# Altium PCB E9A_05_6231.PcbDoc
Units mil, origin at the board's own origin, x right, y up, seen from the top; angles counter-clockwise.
Board outline 6000 x 4000 mil, 2 copper layers (Top Layer, Bottom Layer); 25 components, 17 nets, 97 pads, 4 vias.
Unrouted connection lines stored in the file: 2.
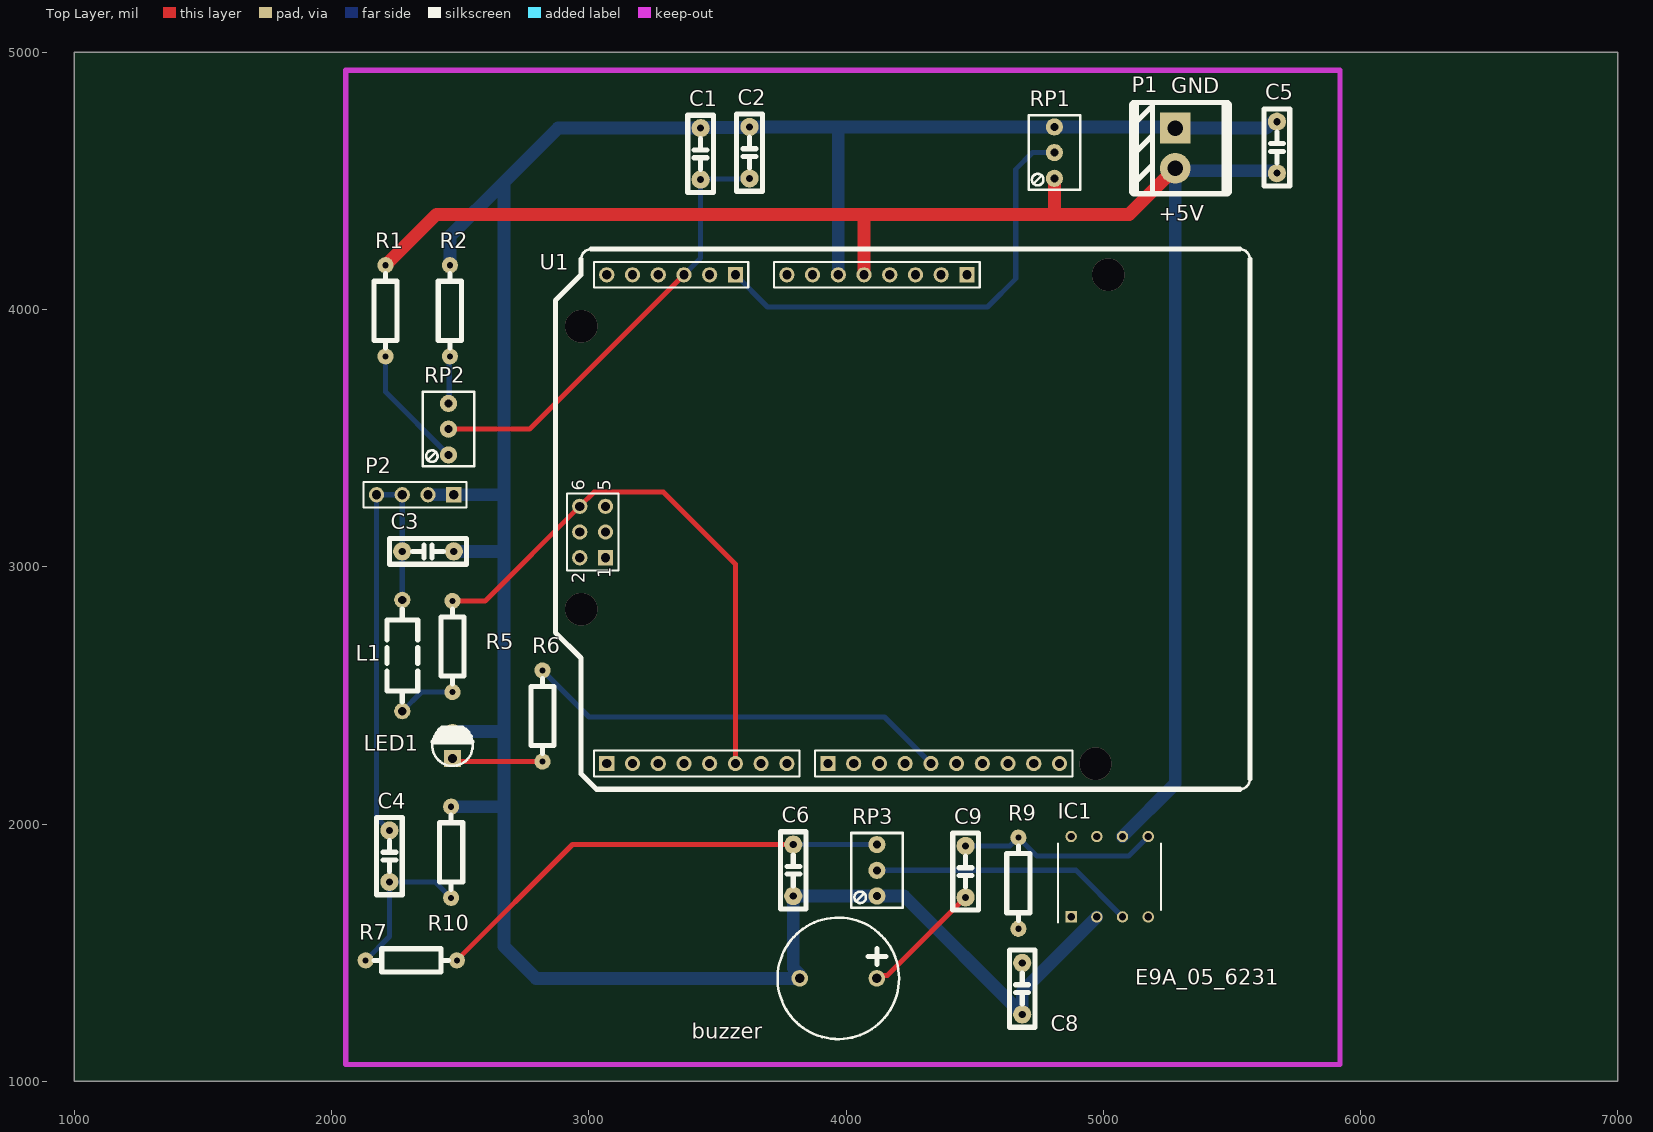
[diagram p0: Top Layer view]
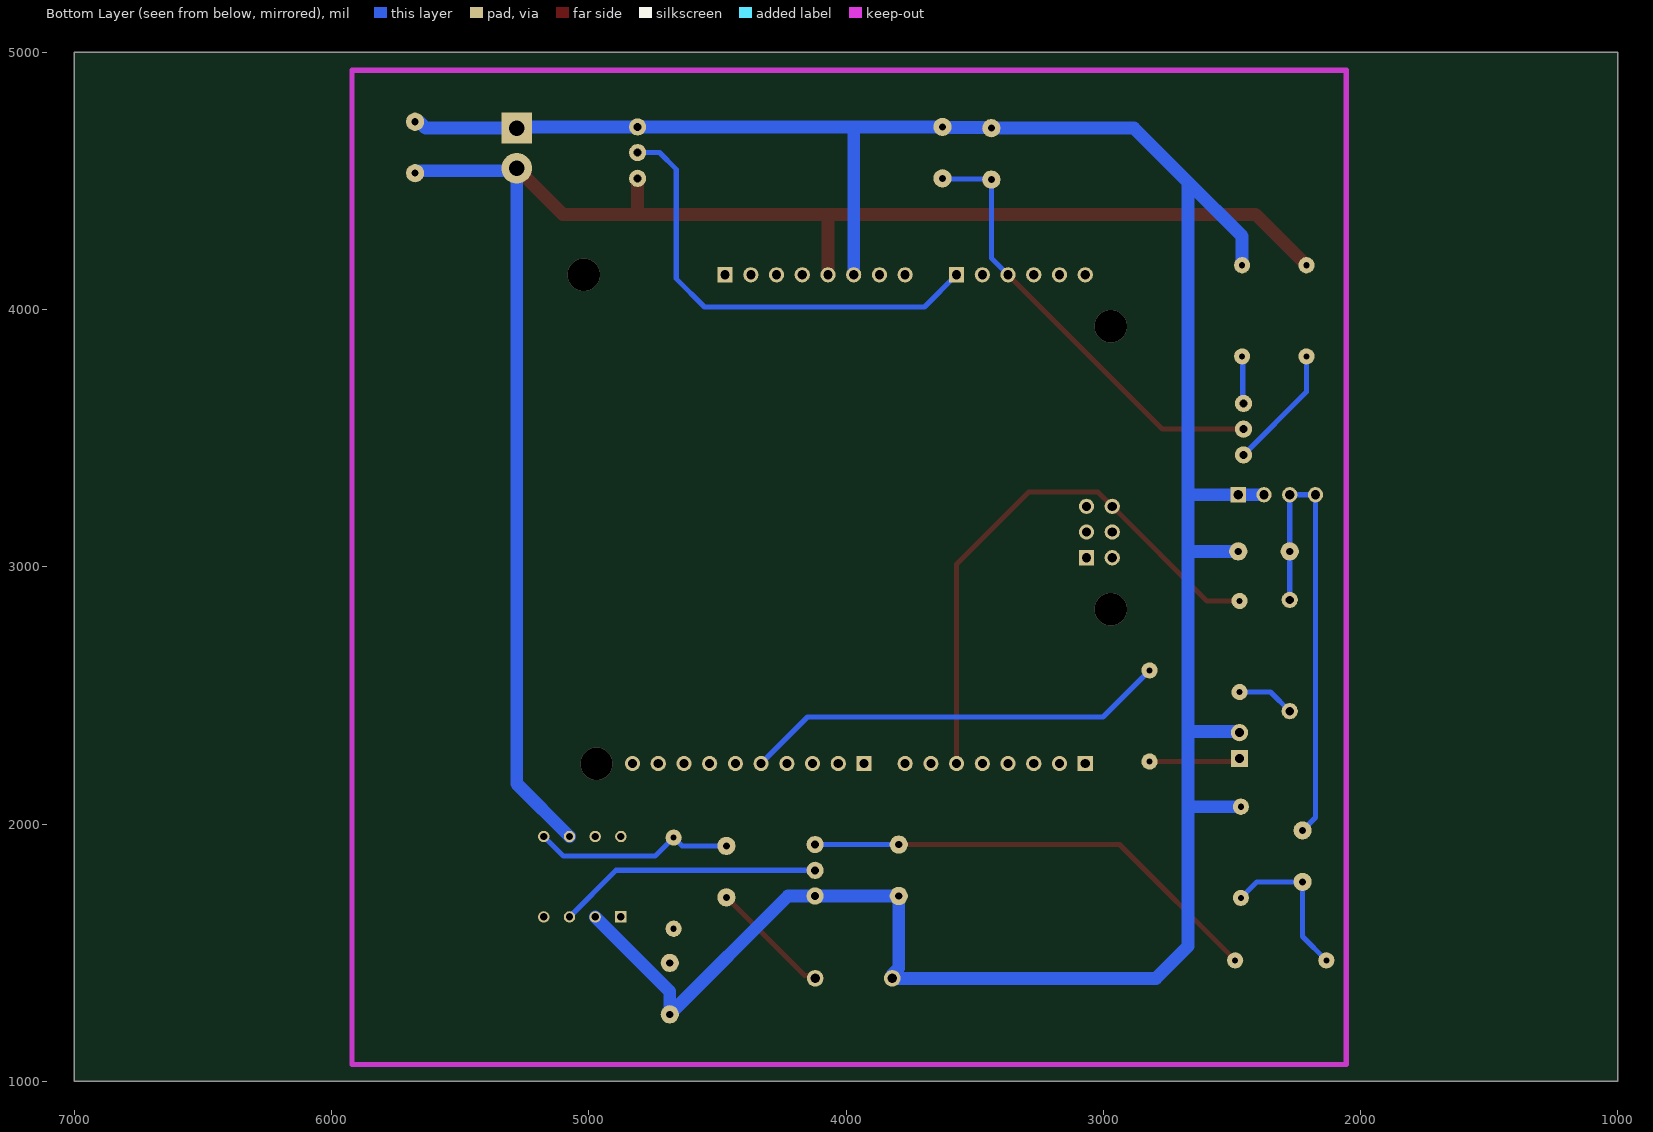
[diagram p1: Bottom Layer view, seen from below]
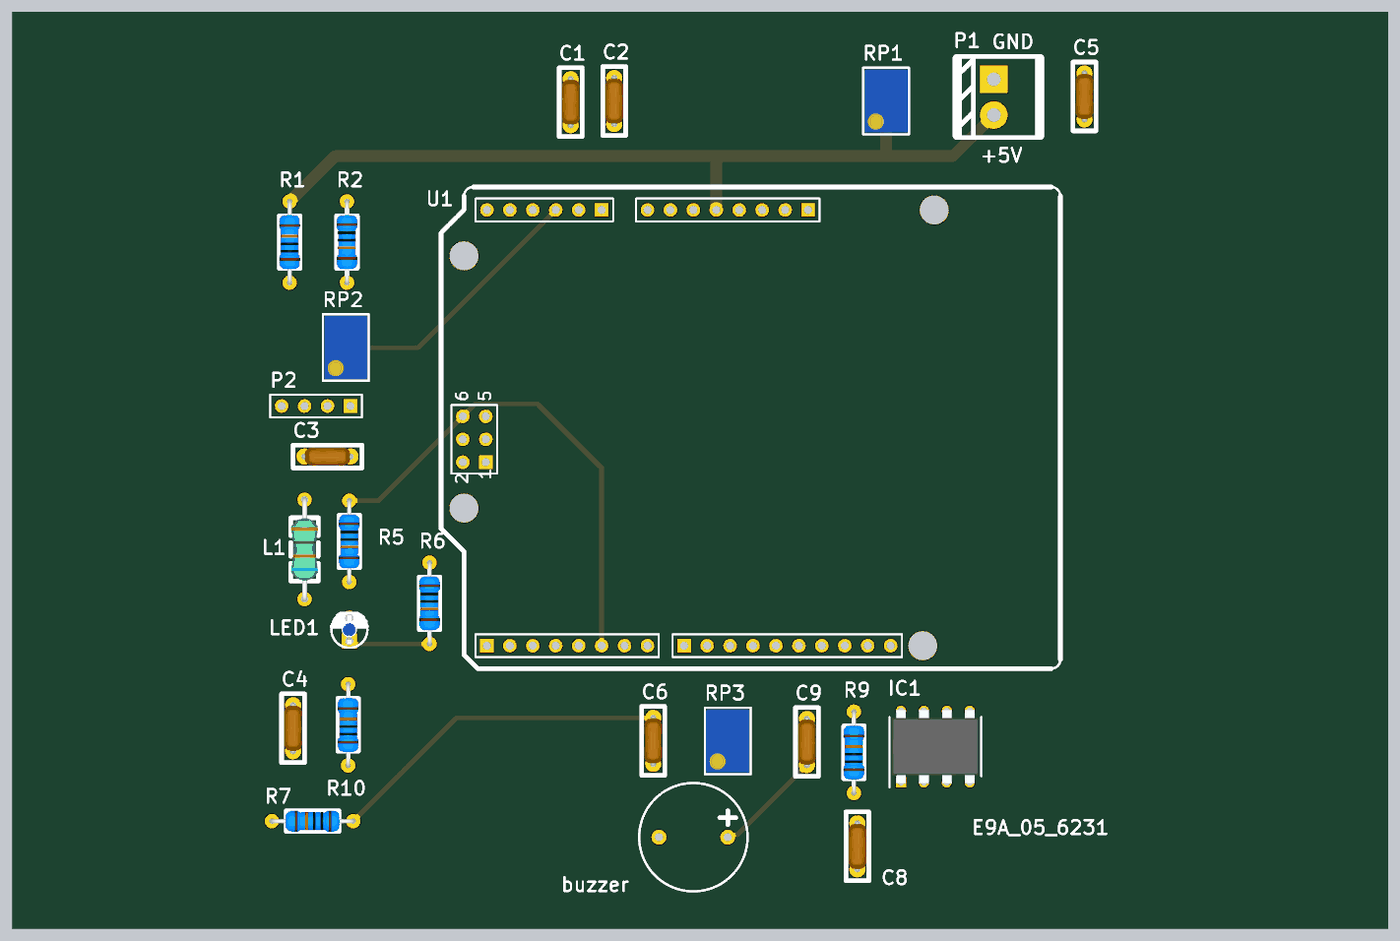
[diagram p2: 3D render of the assembled board from above, using the file's embedded part models]

## Layer stack, top to bottom
Top Solder: solder mask 0.4, Solder Resist, Dk 3.5
Top Layer: signal copper 1.4
Dielectric 1: dielectric 12.6, FR-4, Dk 4.8
Bottom Layer: signal copper 1.4
Bottom Solder: solder mask 0.4, Solder Resist, Dk 3.5

## Board outline
1000,1000 7000,1000 7000,5000 1000,5000

## Design rules (kind name [scope] priority, off if disabled: settings)
Clearance [All] p1: gap=10 ignorepadtopadclearanceinfootprint=FALSE except(0: Arc-Hole Track-Hole SMDPad-Hole THPad-Hole Via-Hole Fill-Hole Poly-Hole Region-Hole Text-Hole)
PolygonConnect [All] p1: connectstyle=Relief reliefconductorwidth=10 reliefentries=4 polygonreliefangle="90 Angle" airgapwidth=10
RoutingVias [All] p1: holewidth=28 width=50 viastyle="Through Hole" minholewidth=28 minwidth=50 maxholewidth=28 maxwidth=50
SolderMaskExpansion [All] p1: expansion=4 istentingtop=FALSE
Width [All] p1: maxlimit=50 minlimit=10 preferedwidth=20 minimp=50.000000 maximp=50.000000 favimp=50.000000
30 further rules are at their usual default settings.

## Components (designator, comment, footprint, x,y, rotation, side; value= is the part's Value field where it differs from the comment)
buzzer "1K" Buzzer 4120,1400 r180 top
C1 "224" MLCC5.08-A 3435,4605 r270 top
C2 "224" MLCC5.08-A 3625,4610 r270 top
C3 "224" MLCC5.08-A 2375,3060 r180 top
C4 "224" MLCC5.08-A 2225,1875 r90 top
C5 "224" MLCC5.08-A 5675,4630 r90 top
C6 "224" MLCC5.08-A 3795,1820 r90 top
C8 "224" MLCC5.08-A 4685,1360 r270 top
C9 "224" MLCC5.08-A 4465,1815 r90 top
IC1 "LM386N" DIP794W53P254L959H508Q8N 5025,1795 r90 top
L1 "10uH" AL0307 2275,2655 r90 top
LED1 "红色" "LED 3MM-B" 2470,2305 r90 top
P1 "Header 2" "POWER PLUG2" 5280,4705 r90 top
P2 "Header 4" HDR1X4 2475,3280 r180 top
R1 "1K" "RS 1/4W" 2210,3995 r90 top
R2 "1K" "RS 1/4W" 2460,3995 r270 top
R5 "1K" "RS 1/4W" 2470,2690 r270 top
R6 "1K" "RS 1/4W" 2820,2420 r270 top
R7 "1K" "RS 1/4W" 2310,1470 r180 top
R9 "1K" "RS 1/4W" 4670,1770 r90 top
R10 "1K" "RS 1/4W" 2465,1890 r90 top
RP1 "10K" 3266Y 4810,4610 r90 top
RP2 "10K" 3266Y 2455,3535 r90 top
RP3 "10K" 3266Y 4120,1820 r90 top
U1 "Arduino" Arduino-UNO 3930,3185 r180 top

## Footprints (in the part's own frame and the unit in brackets; to place one, negate y for a bottom-side part, rotate by r counter-clockwise, add the part's x,y. Pads: shape width x height; smd on the part's side, far side on the other; paste and mask are expansions set on the pad)
3266Y [mm] "长：7mm，宽：4.8mm，高：7.5mm"
  round 1.7 hole 0.8: 1(-2.54,0) 2(0,0) 3(2.54,0)
  silkscreen extent -3.68,-2.54 3.68,2.54, body extent -3.5,-2.4 3.5,2.4, height 8.03
AL0307 [mm] "11*3*7mm（脚距，直径，长度）"
  round 1.6 hole 0.8: 1(-5.5,0) 2(5.5,0)
  silkscreen extent -4.57,-1.52 4.57,1.52, body extent -5.78,-1.51 5.78,1.51, height 3.06
Arduino-UNO [mm] "Arduino板"
  rect 1.5x1.5 hole 0.9: 1(21.844,24.13) 1(21.971,3.81) 9(0,24.13) 19(-13.716,-24.13) 27(9.144,-24.13)
  round 1.5 hole 0.9: 2(19.304,24.13) 2(24.511,3.81) 3(16.764,24.13) 3(21.971,1.27) 4(14.224,24.13) 4(24.511,1.27) 5(11.684,24.13) 5(21.971,-1.27) 6(9.144,24.13) 6(24.511,-1.27) 7(6.604,24.13) 8(4.064,24.13) 10(-2.54,24.13) 11(-5.08,24.13) 12(-7.62,24.13) 13(-10.16,24.13) 14(-12.7,24.13) 15(-15.24,24.13) 16(-17.78,24.13) 17(-20.32,24.13) 18(-22.86,24.13) 20(-11.176,-24.13) 21(-8.636,-24.13) 22(-6.096,-24.13) 23(-3.556,-24.13) 24(-1.016,-24.13) 25(1.524,-24.13) 26(4.064,-24.13) 28(11.684,-24.13) 29(14.224,-24.13) 30(16.764,-24.13) 31(19.304,-24.13) 32(21.844,-24.13)
  silkscreen extent -41.66,-26.67 26.92,26.67
Buzzer [mil] "蜂鸣器"
  round 65 hole 36: 1(0,0) 2(300,0)
  silkscreen extent -86,-236 386,236
DIP794W53P254L959H508Q8N [mm]
  rect 1.13x1.13 hole 0.73: 1(-3.97,3.81)
  round 1.13 hole 0.73: 2(-3.97,1.27) 3(-3.97,-1.27) 4(-3.97,-3.81) 5(3.97,-3.81) 6(3.97,-1.27) 7(3.97,1.27) 8(3.97,3.81)
  silkscreen extent -4.53,-5.08 3.3,5.08, body extent -4.1,-4.79 4.1,4.79, height 5.08
HDR1X4 [mm] "Connector; Header; 4 Position"
  rect 1.5x1.5 hole 0.9: 1(0,0)
  round 1.5 hole 0.9: 2(2.54,0) 3(5.08,0) 4(7.62,0)
  silkscreen extent -1.27,-1.27 8.89,1.27
"LED 3MM-B" [mm] "蓝色3mm直插LED"
  rect 1.7x1.7 hole 0.9: 1(-1.27,0)
  round 1.7 hole 0.9: 2(1.27,0)
  silkscreen extent -2.01,-2 1.72,1.98, body extent -1.95,-1.95 1.64,1.95, height 5.55
MLCC5.08-A [mm] "独石电容，脚距5.08mm"
  round 1.8 hole 0.7: 1(-2.54,0) 2(2.54,0)
  silkscreen extent -3.81,-1.27 3.81,1.27, body extent -2.79,-1 2.79,1, height 3.71
"POWER PLUG2" [mil] "单电源插座"
  rect 120x120 hole 60: 1(0,0)
  round 120 hole 60: 2(-156,0)
  silkscreen extent -255,-204 100,164
"RS 1/4W" [mm] "直插色环电阻，脚距9mm，直径2.3mm"
  round 1.6 hole 0.6: 1(-4.5,0) 2(4.5,0)
  silkscreen extent -3.68,-1.14 3.68,1.14, body extent -4.72,-1.16 4.73,1.16, height 2.32

## Part data
buzzer R1 R2 R5 R6 R7 R9 R10: library part R-CRR, "直插色环电阻", BOM名称=色环电阻, 学习资源=www.ooocke.com, 版权归属=源创客
C1 C2 C3 C4 C5 C6 C8 C9: library part C-MLCC, "独石电容", BOM名称=独石电容, 学习资源=www.ooocke.com, 版权归属=源创客
IC1: "Integrated Circuit", Manufacturer_Name="Texas Instruments", Mouser Part Number=595-LM386N, Datasheet Link=http://www.ti.com/lit/ds/symlink/lm386.pdf, Height=5.08mm, Manufacturer_Part_Number=LM386N, Mouser Price/Stock=https://www.mouser.co.uk/ProductDetail/Texas-Instruments/LM386N?qs=E2%2FxqS9xjzoJP%2FIW26Y6YA%3D%3D
L1: library part L-AL, "色环电感", BOM名称=色环电感, 学习资源=www.ooocke.com, 版权归属=源创客
LED1: library part LED-3MM, "插件LED", BOM名称=插件LED, 学习资源=www.ooocke.com, 版权归属=源创客
P1: "Header, 2-Pin", LatestRevisionDate=17-Jul-2002, LatestRevisionNote="Re-released for DXP Platform.", Publisher="Altium Limited"
P2: "Header, 4-Pin", LatestRevisionDate=17-Jul-2002, LatestRevisionNote="Re-released for DXP Platform.", Publisher="Altium Limited"
RP1 RP2 RP3: library part RP-ID, "插件单联电位器", BOM名称=插件电位器, 学习资源=www.ooocke.com, 版权归属=源创客
U1: library part Arduino-UNO

## Via types
v1: diameter 125.98, hole 125.98, Top Layer to Bottom Layer, 4 vias

## Nets (pads, with @x,y where several pads share a name; then routed paths per layer and width w, separated by ;. In a path a pad name is that pad's centre, name@x,y a point inside that pad or via, vN(x,y) a via of type N, cw(c..) or ccw(c..) an arc to the next point about the centre after c; other vN are vias at no path point)
+5: C5.1 IC1.6 P1.2 R1.2 RP1.1 U1.23 | length 6686.6
  Top Layer w50: R1.2 2407.83,4370 4070,4370 ; U1.23 4070,4370 ; RP1.1 4810,4370 ; P1.2 5101,4370 4810,4370 ; 4070,4370 4810,4370
  Bottom Layer w50: IC1.6 5280,2156.3 P1.2 5289.5,4539.5 5665.5,4539.5 C5.1
GND: buzzer.2 C1.1 C2.1 C3.1 C5.2 C6.1 C8.2 IC1.2 IC1.4 LED1.2 P1.1 P2.1 P2.2 R2.1 R10.2 RP1.3 RP3.1 U1.24 | length 11072.8
  Bottom Layer w50: P2.2 P2.1 2670,3280 ; R2.1 2460,4285 2670,4495 ; R10.2 2667.83,2067.17 2670,2065 ; LED1.2 2475,2360 2670,2360 ; C3.1 2670,3060 ; U1.24 3970,4705 3975,4710 ; IC1.2 4685,1348.7 C8.2 4225,1720 RP3.1 C6.1 3795,1439.88 3820,1414.88 buzzer.2 2795,1400 2670,1525 2670,2065 ; C5.2 5658.53,4730 5633.53,4705 P1.1 5275,4710 RP1.3 3975,4710 ; 2670,2065 2670,2360 ; 2670,2360 2670,3060 ; 2670,3060 2670,3280 ; 2670,3280 2670,4495 ; 2670,4495 2880,4705 C1.1 3437.5,4707.5 3622.5,4707.5 C2.1 3975,4710
Netbuzzer_1: buzzer.1 C9.1 | length 475.5
  Top Layer w20: buzzer.1 4130.52,1410.52 4160.52,1410.52 C9.1
NetC1_2: C1.2 C2.2 RP2.2 U1.29 | length 1752.5
  Top Layer w20: RP2.2 2770,3535 U1.29
  Bottom Layer w20: U1.29 3435,4200 C1.2 3437.5,4507.5 3622.5,4507.5 C2.2
NetC3_2: C3.2 C4.2 L1.2 P2.3 P2.4 | length 1834.2
  Bottom Layer w20: C4.2 2175,2025 P2.4 P2.3 C3.2 L1.2
NetC4_1: C4.1 R7.2 R10.1 | length 608.9
  Bottom Layer w20: R7.2 2225,1562.17 C4.1 2402.83,1775 R10.1
NetC6_2: C6.2 R7.1 RP3.3 | length 1819.2
  Top Layer w20: R7.1 2937.17,1920 C6.2
  Bottom Layer w20: C6.2 RP3.3
NetC8_1: C8.1 R9.1
NetC9_2: C9.2 IC1.5 R9.2 | length 784.8
  Bottom Layer w20: C9.2 4636.41,1915 4668.58,1947.17 R9.2 4742.17,1875 5098.7,1875 IC1.5
NetIC1_3: IC1.3 RP3.2 | length 1030.1
  Bottom Layer w20: RP3.2 4893.7,1820 IC1.3
NetL1_1: L1.1 R5.2 | length 225.8
  Bottom Layer w20: L1.1 2349.37,2512.83 R5.2
NetLED1_1: LED1.1 R6.2 | length 355
  Top Layer w20: LED1.1 2482.17,2242.83 R6.2
NetR1_1: R1.1 RP2.1 | length 484.3
  Bottom Layer w20: R1.1 2210,3680 RP2.1
NetR2_2: R2.2 RP2.3 | length 184.9
  Bottom Layer w20: RP2.3 2457.5,3637.5 2457.5,3815.33 R2.2
NetR5_1: R5.1 U1.6 | length 2166.1
  Top Layer w20: R5.1 2597.17,2867.17 2965,3235 3020,3290 3290,3290 3570,3010 U1.6@3570,2235
NetR6_1: R6.1 U1.13 | length 1660
  Bottom Layer w20: R6.1 3001.46,2415.71 4149.29,2415.71 U1.13
NetRP1_2: RP1.2 U1.27 | length 1789.3
  Bottom Layer w20: U1.27 3695,4010 4550,4010 4660,4120 4660,4545 4725,4610 RP1.2
pads on no net: IC1.1 IC1.7 IC1.8 U1.1 U1.2 U1.3 U1.4 U1.5 U1.7 U1.8 U1.9 U1.10 U1.11 U1.12 U1.14 U1.15 U1.16 U1.17 U1.18 U1.19 U1.20 U1.21 U1.22 U1.25 U1.26 U1.28 U1.30 U1.31 U1.32
copper on no net:
  other v1: 4970,2235 2970,2835 2970,3935 5020,4135

## Keep-outs
Keep-Out Layer:
  lines w20: 5920,1065 5920,1065 ; 5920,1065 5920,4930 2055,4930 2055,1065 5920,1065

## Silkscreen, mask and mechanical layers (free items; w line width, h text height)
Top Overlay:
  text "GND" at 5265,4840 h60
  text "+5V" at 5215,4345 h60
  text "E9A_05_6231" at 5125,1375 h60

## Text inside footprints (layer, text, board x,y; h text height)
U1: Top Overlay "6" at 2985,3295 h50 r90; Top Overlay "5" at 3085,3295 h50 r90; Top Overlay "2" at 2985,2935 h50 r90; Top Overlay "1" at 3085,2955 h50 r90